# Altium PCB inverter_pcb.PcbDoc
Units mm, origin at the board's own origin, x right, y up, seen from the top; angles counter-clockwise.
Board outline 152.4 x 101.6 mm, 2 copper layers (Top Layer, Bottom Layer); 141 components, 109 nets, 379 pads, 3 vias.
Unrouted connection lines stored in the file: 178.
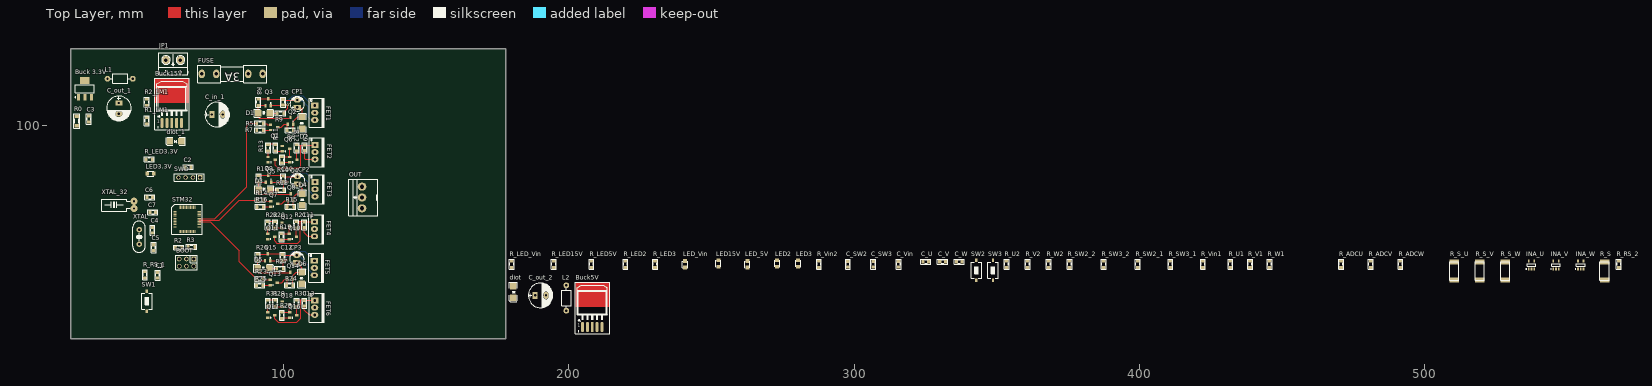
[diagram p0: Top Layer view]
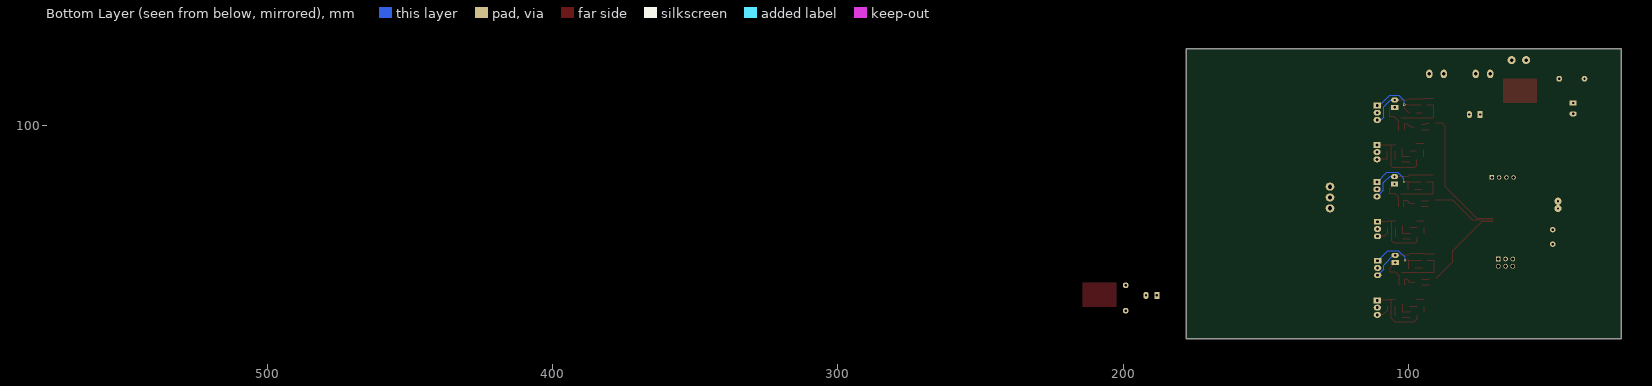
[diagram p1: Bottom Layer view, seen from below]

## Layer stack, top to bottom
Top Solder: solder mask 0.0102, Solder Resist, Dk 3.5
Top Layer: signal copper 0.0356
Dielectric 1: dielectric 0.32, FR-4, Dk 4.8
Bottom Layer: signal copper 0.0356
Bottom Solder: solder mask 0.0102, Solder Resist, Dk 3.5

## Board outline
25.4,25.4 177.8,25.4 177.8,127 25.4,127

## Design rules (kind name [scope] priority, off if disabled: settings)
Clearance [All] p1: gap=0.203 ignorepadtopadclearanceinfootprint=FALSE
PolygonConnect [All] p1: connectstyle=Relief reliefconductorwidth=0.254 reliefentries=4 polygonreliefangle="90 Angle" airgapwidth=0.254
RoutingVias [All] p1: holewidth=0.711 width=1.27 viastyle="Through Hole" minholewidth=0.711 minwidth=1.27 maxholewidth=0.711 maxwidth=1.27
SolderMaskExpansion [All] p1: expansion=0.102
Width [All] p1: maxlimit=1.524 minlimit=0.203 preferedwidth=0.254
30 further rules are at their usual default settings.

## Components (designator, comment, footprint, x,y, rotation, side; value= is the part's Value field where it differs from the comment)
BOOT "JP3x2" JP3-D2T 65.964,52.019 r180 top
Buck5V "LM2576" TO263 207.823,35.433 r0 top
Buck15V "LM2576" TO263 60.452,106.934 r0 top
"Buck 3.3V" "LM3940-3.3" SOT223 30.378,112.903 r0 top
C1 "104,0805" CN-SMD-0805 55.855,47.65 r90 top value=33pF
C2 "104,0805" CN-SMD-0805 66.548,85.522 r180 top value=33pF
C3 "104,0805" CN-SMD-0805 31.75,102.362 r270 top value=33pF
C4 "20P,0805" CN-SMD-0805 54.102,63.373 r270 top value=33pF
C5 "20P,0805" CN-SMD-0805 54.483,57.302 r270 top value=33pF
C6 "20P,0805" CN-SMD-0805 53.121,75.006 r0 top value=33pF
C7 "20P,0805" CN-SMD-0805 54.213,69.723 r0 top value=33pF
C8 "10nF" CN-SMD-0805 99.847,108.28 r90 top value=33pF
C9 "10nF" CN-SMD-0805 107.442,92.278 r270 top value=33pF
C10 "10nF" CN-SMD-0805 99.924,81.432 r90 top value=33pF
C11 "10nF" CN-SMD-0805 107.264,65.329 r270 top value=33pF
C12 "10nF" CN-SMD-0805 99.695,53.873 r90 top value=33pF
C13 "10nF" CN-SMD-0805 107.34,37.795 r270 top value=33pF
C_in_1 "100uF" CP1.5/3.4 74.854,103.911 r0 top value=1000uF/16V
C_out_1 "100uF" CP1.5/3.4 42.291,107.975 r270 top value=1000uF/16V
C_out_2 "100uF" CP1.5/3.4 188.189,40.538 r0 top value=1000uF/16V
C_SW2 "104,0805" CN-SMD-0805 297.815,51.46 r90 top value=33pF
C_SW3 "104,0805" CN-SMD-0805 306.705,51.46 r90 top value=33pF
C_U "XXpF" CN-SMD-0805 325.145,52.4 r0 top value=33pF
C_V "XXpF" CN-SMD-0805 330.987,52.4 r0 top value=33pF
C_Vin "XXpF" CN-SMD-0805 315.595,51.46 r90 top value=33pF
C_W "XXpF" CN-SMD-0805 336.829,52.4 r0 top value=33pF
CP1 "47uF" CP1/2 104.8,106.451 r90 top value=10uF/50V
CP2 "47uF" CP1/2 104.877,79.604 r90 top value=10uF/50V
CP3 "47uF" CP1/2 104.648,52.045 r90 top value=10uF/50V
D1 "T4" DIO-SMD-106 93.193,104.419 r180 top value=1N5007
D2 "M7" DIO-SMD-106 106.553,101.041 r270 top value=1N5007
D3 "T4" DIO-SMD-106 93.269,77.572 r180 top value=1N5007
D4 "M7" DIO-SMD-106 106.629,74.193 r270 top value=1N5007
D5 "T4" DIO-SMD-106 93.04,50.013 r180 top value=1N5007
D6 "M7" DIO-SMD-106 106.401,46.634 r270 top value=1N5007
diot "Diode SMD" DIO-SMD-106 180.569,41.681 r90 top value=1N5007
diot_1 "Diode SMD" DIO-SMD-106 62.205,94.59 r0 top value=1N5007
FET1 "STP80NF70" QTO-220 110.947,107.112 r270 top value=IRF840
FET2 "STP80NF70" QTO-220 110.998,93.294 r270 top value=IRF840
FET3 "STP80NF70" QTO-220 111.023,80.264 r270 top value=IRF840
FET4 "STP80NF70" QTO-220 110.846,66.319 r270 top value=IRF840
FET5 "STP80NF70" QTO-220 110.795,52.705 r270 top value=IRF840
FET6 "STP80NF70" QTO-220 110.922,38.786 r270 top value=IRF840
FUSE "F1A" Fuse1 82.007,118.161 r180 top value=Fuse
INA_U "INA193_4_5" SOT95_SOT23 537.388,51.181 r90 top
INA_V "INA193_4_5" SOT95_SOT23 546.024,51.181 r90 top
INA_W "INA193_4_5" SOT95_SOT23 554.66,51.181 r90 top
JP1 "Header 2_1" HED2 63.856,123.012 r180 top value="Header 2"
L1 "100mH" L/0.4 38.278,116.484 r0 top value="150 mH"
L2 "100mH" L/0.4 199.111,35.179 r90 top value="150 mH"
LED2 "power 0805" LED-0805-Blue 272.974,50.546 r90 top value="LED 3 - 5 ly 2 Colour"
LED3 "power 0805" LED-0805-Blue 280.34,50.546 r90 top value="LED 3 - 5 ly 2 Colour"
LED3.3V "power 0805" LED-0805-Blue 54.483,83.21 r180 top value="LED 3 - 5 ly 2 Colour"
LED15V "power 0805" LED-0805-Blue 252.4,50.546 r90 top value="LED 3 - 5 ly 2 Colour"
LED_5V "power 0805" LED-0805-Blue 262.56,50.292 r90 top value="LED 3 - 5 ly 2 Colour"
LED_Vin "power 0805" LED-0805-Blue 240.716,50.292 r90 top value="LED 3 - 5 ly 2 Colour"
OUT "Header 3" HED3B 127.508,71.044 r90 top
Q1 "G1" SOT23B 96.672,99.441 r270 top value=C1815
Q2 "Y2" SOT23B 102.438,101.778 r0 top value=A1015
Q3 "Y2" SOT23B 94.615,108.28 r0 top value=A1015
Q4 "Y2" SOT23B 103.454,88.101 r270 top value=A1015
Q5 "Y1" SOT23B 95.809,88.101 r270 top value=C1815
Q6 "Y1" SOT23B 100.863,91.937 r270 top value=C1815
Q7 "G1" SOT23B 96.749,72.593 r270 top value=C1815
Q8 "Y2" SOT23B 102.514,74.93 r0 top value=A1015
Q9 "Y2" SOT23B 94.691,81.432 r0 top value=A1015
Q10 "Y2" SOT23B 103.302,61.152 r270 top value=A1015
Q11 "Y1" SOT23B 95.656,61.152 r270 top value=C1815
Q12 "Y1" SOT23B 100.711,64.987 r270 top value=C1815
Q13 "G1" SOT23B 96.52,45.034 r270 top value=C1815
Q14 "Y2" SOT23B 102.286,47.371 r0 top value=A1015
Q15 "Y2" SOT23B 94.463,53.873 r0 top value=A1015
Q16 "Y2" SOT23B 103.378,33.618 r270 top value=A1015
Q17 "Y1" SOT23B 95.733,33.618 r270 top value=C1815
Q18 "Y1" SOT23B 100.787,37.454 r270 top value=C1815
R0 "0 ohm" RES-SMD-1206 27.534,101.702 r90 top
R1_LM1 "Res" RES-SMD-0805 52.095,101.803 r270 top
R2 "100k,0805" RES-SMD-0805 63.297,57.353 r0 top
R2_LM1 "Res" RES-SMD-0805 52.07,108.229 r270 top
R3 "100k,0805" RES-SMD-0805 67.716,57.556 r0 top
R5 "2k2" RES-SMD-0805 91.77,100.813 r180 top
R6 "510" RES-SMD-0805 102.311,98.45 r180 top
R7 "2k2" RES-SMD-0805 91.77,98.45 r180 top
R8 "2k2" RES-SMD-0805 91.161,108.28 r90 top
R9 "100" RES-SMD-0805 98.933,104.343 r0 top
R10 "510" RES-SMD-0805 99.492,88.062 r90 top
R11 "2k2" RES-SMD-0805 97.18,92.278 r90 top
R12 "100" RES-SMD-0805 104.648,92.278 r90 top
R13 "2k2" RES-SMD-0805 94.615,92.278 r270 top
R14 "2k2" RES-SMD-0805 91.846,73.965 r180 top
R15 "510" RES-SMD-0805 102.413,71.603 r180 top
R16 "2k2" RES-SMD-0805 91.846,71.603 r180 top
R17 "2k2" RES-SMD-0805 91.237,81.432 r90 top
R18 "100" RES-SMD-0805 99.009,77.495 r0 top
R19 "510" RES-SMD-0805 99.339,61.112 r90 top
R20 "2k2" RES-SMD-0805 97.028,65.329 r90 top
R21 "100" RES-SMD-0805 104.496,65.329 r90 top
R22 "2k2" RES-SMD-0805 94.437,65.329 r270 top
R23 "2k2" RES-SMD-0805 91.618,46.406 r180 top
R24 "510" RES-SMD-0805 102.159,44.044 r180 top
R25 "2k2" RES-SMD-0805 91.618,44.044 r180 top
R26 "2k2" RES-SMD-0805 91.008,53.873 r90 top
R27 "100" RES-SMD-0805 98.781,49.936 r0 top
R28 "510" RES-SMD-0805 99.441,33.579 r90 top
R29 "2k2" RES-SMD-0805 97.104,37.795 r90 top
R30 "100" RES-SMD-0805 104.572,37.795 r90 top
R31 "2k2" RES-SMD-0805 94.539,37.795 r270 top
R_ADCU "Res" RES-SMD-0805 470.687,51.46 r90 top
R_ADCV "Res" RES-SMD-0805 481.076,51.46 r90 top
R_ADCW "Res" RES-SMD-0805 491.49,51.46 r90 top
R_LED2 "510,0805" RES-SMD-0805 219.862,51.46 r90 top
R_LED3 "510,0805" RES-SMD-0805 230.251,51.46 r90 top
R_LED3.3V "510,0805" RES-SMD-0805 52.934,88.189 r180 top
R_LED5V "510,0805" RES-SMD-0805 207.924,51.46 r90 top
R_LED15V "510,0805" RES-SMD-0805 194.716,51.46 r90 top
R_LED_Vin "510,0805" RES-SMD-0805 179.984,51.46 r90 top
R_RS_1 "10k,0805" RES-SMD-0805 51.435,47.803 r90 top
R_RS_2 "10k,0805" RES-SMD-0805 568.02,51.46 r90 top
R_S "Res" RES-SMD-2512 563.143,49.098 r90 top
R_S_U "Res" RES-SMD-2512 510.515,49.098 r90 top
R_S_V "Res" RES-SMD-2512 519.43,49.098 r90 top
R_S_W "Res" RES-SMD-2512 528.32,49.098 r90 top
R_SW2_1 "10k,0805" RES-SMD-0805 399.415,51.46 r90 top
R_SW2_2 "10k,0805" RES-SMD-0805 375.539,51.46 r90 top
R_SW3_1 "10k,0805" RES-SMD-0805 410.845,51.46 r90 top
R_SW3_2 "10k,0805" RES-SMD-0805 387.477,51.46 r90 top
R_U1 "Res" RES-SMD-0805 431.902,51.46 r90 top
R_U2 "Res" RES-SMD-0805 353.441,51.46 r90 top
R_V1 "Res" RES-SMD-0805 438.76,51.46 r90 top
R_V2 "Res" RES-SMD-0805 360.807,51.46 r90 top
R_Vin1 "Res" RES-SMD-0805 422.275,51.46 r90 top
R_Vin2 "Res" RES-SMD-0805 287.655,51.46 r90 top
R_W1 "Res" RES-SMD-0805 445.618,51.46 r90 top
R_W2 "Res" RES-SMD-0805 368.173,51.46 r90 top
STM32 "STM32F103C8T6" "LQFP 48" 61.451,71.937 r0 top
SW1 "2" SW1-SMD 52.095,38.532 r90 top value="SW chip 2 pin"
SW2 "2" SW1-SMD 342.824,49.352 r90 top value="SW chip 2 pin"
SW3 "2" SW1-SMD 348.666,49.352 r90 top value="SW chip 2 pin"
SWD "JP4" JP4-C1T 70.764,81.89 r180 top
XTAL "8Mhz" XT2 49.428,61.036 r90 top value=4Mhz
XTAL_32 "32,768 Khz" XT32k 47.6,70.993 r180 top value=32,768khz

## Footprints (in the part's own frame and the unit in brackets; to place one, negate y for a bottom-side part, rotate by r counter-clockwise, add the part's x,y. Pads: shape width x height; smd on the part's side, far side on the other; paste and mask are expansions set on the pad)
CN-SMD-0805 [mm]
  rect 1.1x1.397 smd: 1(-1,0) 2(1,0)
  silkscreen extent -1.78,-0.86 1.78,0.84, body extent -1,-0.62 1,0.63, height 0.8
CP1.5/3.4 [mil] "Tu hoa 220->470uF,16V, 470uF/16V,25V"
  rect 70x100 hole 32: 1(0,0)
  oval 70x100 hole 32: 2(150,0)
  silkscreen extent -95,-170 245,170, body extent -85,-157 230,157, height 446
CP1/2 [mil] "Tu hoa < 22uF/16>50V"
  rect 70x100 hole 32: 1(0,0)
  oval 70x100 hole 32: 2(100,0)
  silkscreen extent -53,-100 146,100, body extent -49,-99 149,99, height 287
DIO-SMD-106 [mil]
  rect 90x90.55 smd: 1(80,0) 2(-80,0)
  silkscreen extent -130,-55 135,55, body extent -99,-50 106,52, height 95
Fuse1 [mm]
  oval 2.2x3 hole 1.2: 1(-10.684,0) 1(-5.604,0) 2(5.579,0) 2(10.659,0)
  silkscreen extent -12.12,-3.05 12.09,3.05, body extent -10.84,-2.95 10.87,2.95, height 9.75
HED2 [mil] "Header 2, 2 pin, hight 300mil, Pin to Pin 200, Colour Green"
  round 110 hole 50: 1(0,0) 2(200,0)
  silkscreen extent -106,-100 300,200, body extent -92,-140 302,155, height 394
HED3B [mil] "Header 3, 3 pin, hight 300mil, Pin to Pin 150, Colour White"
  oval 110x120 hole 60: 1(0,0) 2(150,0) 3(300,0)
  silkscreen extent -100,-220 400,180, body extent -104,-221 400,145, height 285
JP3-D2T [mm] "6 pins, dual pin, straight, gold plating"
  rect 1.6x1.6 hole 1.1: 1(-2.54,-1.27)
  round 1.6 hole 1.1: 2(0,-1.27) 3(2.54,-1.27) 4(2.54,1.27) 5(0,1.27) 6(-2.54,1.27)
  silkscreen extent -3.81,-2.54 3.81,2.54, body extent -3.81,-2.54 3.81,2.54, height 8.55
JP4-C1T [mm] "4 row, straight, gold plating"
  rect 1.52x1.52 hole 1.02: 1(0,0)
  round 1.52 hole 1.02: 2(2.54,0) 3(5.08,0) 4(7.62,0)
  silkscreen extent -1.52,-1.27 9.14,1.27, body extent -1.52,-1.25 9.14,1.25, height 8.51
L/0.4 [mil] "Inductor , 2 Pin, L 350mil, W 150 mil"
  round 80 hole 31: 1(0,0) 2(350,0)
  silkscreen extent 40,-65 310,65
LED-0805-Blue [mil]
  rect 50x55 smd: 1(0,0) 2(90,0)
  silkscreen extent 0,-35 90,35, body extent 5,-25 85,25, height 43
"LQFP 48" [mm]
  rect 1.2x0.3 smd: 1(0.5,-2) 2(0.5,-2.5) 3(0.5,-3) 4(0.5,-3.5) 5(0.5,-4) 6(0.5,-4.5) 7(0.5,-5) 8(0.5,-5.5) 9(0.5,-6) 10(0.5,-6.5) 11(0.5,-7) 12(0.5,-7.5) 25(9,-7.5) 26(9,-7) 27(9,-6.5) 28(9,-6) 29(9,-5.5) 30(9,-5) 31(9,-4.5) 32(9,-4) 33(9,-3.5) 34(9,-3) 35(9,-2.5) 36(9,-2)
  round 1 on Top Overlay: 3(0.7,-0.7)
  rect 0.3x1.2 smd: 13(2,-9) 14(2.5,-9) 15(3,-9) 16(3.5,-9) 17(4,-9) 18(4.5,-9) 19(5,-9) 20(5.5,-9) 21(6,-9) 22(6.5,-9) 23(7,-9) 24(7.5,-9) 37(7.5,-0.5) 38(7,-0.5) 39(6.5,-0.5) 40(6,-0.5) 41(5.5,-0.5) 42(5,-0.5) 43(4.5,-0.5) 44(4,-0.5) 45(3.5,-0.5) 46(3,-0.5) 47(2.5,-0.5) 48(2,-0.5)
  silkscreen extent -0.6,-10 10,0.5, body extent 0.15,-9.35 9.35,-0.15, height 1.6
QTO-220 [mil] "TO-220 - 1-2-3"
  rect 80x100 hole 39: 1(0,0)
  oval 80x100 hole 39: 2(100,0) 3(200,0)
  silkscreen extent -100,-76 300,130, body extent -119,-64 322,121, height 755
RES-SMD-0805 [mil]
  rect 39.37x55 smd: 1(-45,0) 2(45,0)
  silkscreen extent -70,-34 70,33, body extent -39,-25 39,25, height 31
RES-SMD-1206 [mil]
  rect 50x65 smd: 1(-65,0) 2(65,0)
  silkscreen extent -99,-38 99,39, body extent -63,-31 63,32, height 40
RES-SMD-2512 [mm] "Chip Capacitor, Body 3.2x2.5mm, IPC Medium Density"
  rect 1.8x3.3 smd: 1(-3.2,0.127) 2(3.2,0.127)
  silkscreen extent -3.2,-1.47 3.2,1.73, body extent -3.2,-1.47 3.2,1.73, height 0.6
SOT23B [mm] "SOT 23B"
  rect 0.85x1.2 smd: 1(0.94,-1.245) 2(0,1.25) 3(-0.95,-1.25)
  silkscreen extent 0.77,-0.38 1.02,-0.13, body extent -1.5,-1.3 1.5,1.2, height 1.06
SOT95_SOT23 [mm] "SOT23, 5-Leads, Body 2,90x2,80mm, Pitch 0,95mm, IPC Medium Density"
  rect 1x0.6 smd: 1(-1.375,0.95) 2(-1.375,0) 3(-1.375,-0.95) 4(1.375,-0.95) 5(1.375,0.95)
  silkscreen extent -1.5,-1.55 0.5,1.92, body extent -0.88,-1.52 0.87,1.53, height 1.1
SOT223 [mm]
  rect 1x2.4 smd: 1(-2.3,-2.9) 2(0,-2.9) 3(2.3,-2.9)
  rect 3.3x2.4 smd: 4(0,2.9)
  silkscreen extent -3.47,-3.02 3.35,1.4, body extent -3.25,-3.56 3.25,3.4, height 1.68
SW1-SMD [mm]
  rect 1.2x0.8 smd: 1(-3.5,0) 2(3.5,0)
  silkscreen extent -2.82,-1.85 2.82,1.85, body extent -3.05,-1.85 3.05,1.85, height 2.5
TO263 [mm]
  rrect50% 1x3.4 smd: 1(-3.019,-5.969) 2(-1.319,-5.969) 4(2.081,-5.969) 5(3.781,-5.969)
  rrect50% 1x3.4 smd mask+0: 3(0.381,-5.969)
  Top Layer region: -5.568,1.016 6.432,1.016 6.432,9.65 -5.568,9.65
  silkscreen extent -5.57,-8.35 6.43,9.65, body extent -4.73,-6.84 5.43,7.8, height 4.57
XT2 [mil] "Footpin for Crystal 2 pin"
  round 75 hole 34: 1(-100,0) 2(100,0)
  silkscreen extent -213,-83 217,90, body extent -216,-87 216,90, height 144
XT32k [mil] "Crystal 32k, 2 pin, real timer for DS1307"
  oval 95x100 hole 32: 1(0,0) 2(0,-100)
  silkscreen extent 50,-130 449,36

## Part data
BOOT: "WR-PHD 2.54 mm Dual Socket Header", Manufacturer="W¨¹rth Elektronik eiSos GmbH", partNo=61300621821, ComponentLink1 Description=Manufacturer, ComponentLink1URL=http://www.we-online.com, ComponentLink2 Description=Datasheet, ComponentLink2URL=http://katalog.we-online.de/em/datasheet/6130xx21821.pdf, Created by="Karrer Zheng", Created Date="29 March 2013", NoPins=06
Buck5V Buck15V: Max Input Voltage="12 V", Max Output Current="3 (6.0 peak) A", Max Output Voltage=mV, Temperature Range="-40 to +125 degC", Category=IC-Power, Min Input Voltage=mV, Min Output Voltage=mV, Mounting Technology="Surface Mount", Status=Unreleased, Supply Voltage=mV
"Buck 3.3V": library part LM3940-3.3-SOT223, "3.3 VOLT LINEAR REGULATOR SOT223", Current - Limit (Min)=-, Current - Output=1A, Manufacturer="National Semiconductor", Manufacturer Part Number=LM3940IMP-3.3/NOPB, Operating Temperature="-40°C ~ 125°C", Package / Case="SOT-223 (3 leads + Tab), SC-73, TO-261AA", Supplier Part Number=LM3940IMP-3.3DKR-ND, Voltage - Dropout (Typical)="0.11V @ 100mA", Voltage - Input="4.5 ~ 5.5 V", Voltage - Output=3.3V, Category="Integrated Circuits (ICs)", Number of Regulators=1, Packaging=Digi-Reel®, Regulator Topology="Positive Fixed", RoHS="RoHS Compliant", Supplier=Digi-Key, Supplier 1=Digi-Key, Supplier Part Number 1=LM3940IMP-3.3DKR-ND
C1 C2 C3 C4 C5 C6 C7 C8 C9 C10 C11 C12 C13 C_SW2 C_SW3 C_U C_V C_Vin C_W: library part CN
C_in_1 C_out_1 C_out_2: library part CP4, "Cap 1000uF/16V - 220uF/50V", Description 1="2200uF-3300uF/6,3V - 1000uF-2200uF/10V", Description 2="1000uF/16V - 470uF => 1000uF/25V - 100uF/100V", Description 3=330uF>470uF/35V_220uF>470uF/50V_10uF>22uF/250V, Description 4="220uF => 330uF/63V - 10uF =>33uF/160 - 200V", Description 5="4,7uF>10uF/250V_3,3uF>10uF/400V - 2,2uF>4,7uF/450V"
CP1 CP2 CP3: library part CP1, "Cap P  0,1uF < 22uF , 16 - 50V", Description 1="10 => 220uF/6,3V/10V - 10uF => 100uF/16V", Description 2="0,1uF => 33uF/50V - 10uF => 22uF/63V", Description 3="0,47uF => 10uF/100V"
D1 D2 D3 D4 D5 D6: library part "Diode SMD", "Default Diode", Code - JEDEC=DO-214-AB, Published=8-Jun-2000, Publisher="Altium Limited", Revision="July-2002: Re-released for DXP Platform."
diot diot_1: "Default Diode", Code - JEDEC=DO-214-AB, Published=8-Jun-2000, Publisher="Altium Limited", Revision="July-2002: Re-released for DXP Platform."
FET1 FET2 FET3 FET4 FET5 FET6: library part IRF840, "MOSFET N - CHANNEL 500V - 0.75 - 8A - TO-220"
FUSE: library part Fuse, "Fuse", Designed by=VanDungEvn
JP1: "Header, 2-Pin", Manufacturer="Generic Components", Class=Connector
L1 L2: library part L1, "Inductor"
LED2 LED3 LED3.3V LED15V LED_5V LED_Vin: library part "LED SMD"
OUT: library part Hed3, "Header 3 (Green)"
Q1 Q5 Q6 Q7 Q11 Q12 Q13 Q17 Q18: library part C1815, "NPN 600mW, ECB", =C2383
Q2 Q3 Q4 Q8 Q9 Q10 Q14 Q15 Q16: library part A1015, "PNP 600mW, ECB", =A1013
R0 R1_LM1 R2 R2_LM1 R3 R5 R6 R7 R8 R9 R10 R11 R12 R13 R14 R15 R16 R17 R18 R19 R20 R21 R22 R23 R24 R25 R26 R27 R28 R29 R30 R31 R_ADCU R_ADCV R_ADCW R_LED2 R_LED3 R_LED3.3V R_LED5V R_LED15V R_LED_Vin R_RS_1 R_RS_2 R_S R_S_U R_S_V R_S_W R_SW2_1 R_SW2_2 R_SW3_1 R_SW3_2 R_U1 R_U2 R_V1 R_V2 R_Vin1 R_Vin2 R_W1 R_W2: library part Res-SMD, "Resistor", Manufacturer="Generic Components", Class=Passive, Published=08/06/2000, Publisher="Altium Hobart Technology Centre"
STM32: Manufacturer=STMicroelectronics, Maximum Frequency=72MHz, Maximum Operating Temperature="+85 °C", Minimum Operating Temperature="-40 °C", Package Type=LQFP, Supplier Part Number 1=497-6063-ND, Typical Operating Supply Voltage="2 ? 3.6 V", ADC Channels=10, ADC Resolution=12bit, ADCs="2(10 x 12 bit)", ComponentLink1Description=http://www.st.com/web/en/resource/technical/document/datasheet/CD00161566.pdf?src-supplier=Future+Electronics, ComponentLink1URL=http://www.st.com/web/en/resource/technical/document/datasheet/CD00161566.pdf?src-supplier=Future+Electronics, ComponentLink2Description=https://www.distrelec.biz/Web/Downloads/3_/en/puSTM_ARM-MicroCont-STM32F103_EN.pdf?mime=application%2Fpdf&src-supplier=Distrelec, ComponentLink2URL=https://www.distrelec.biz/Web/Downloads/3_/en/puSTM_ARM-MicroCont-STM32F103_EN.pdf?mime=application%2Fpdf&src-supplier=Distrelec, ComponentLink3Description=https://www.verical.com/server-webapp/html/getDatasheet?partID=69880&src-supplier=Verical, ComponentLink3URL=https://www.verical.com/server-webapp/html/getDatasheet?partID=69880&src-supplier=Verical, ComponentLink4Description=http://www.farnell.com/datasheets/1730126.pdf?src-supplier=Element14, ComponentLink4URL=http://www.farnell.com/datasheets/1730126.pdf?src-supplier=Element14, ComponentLink5Description=http://www.produktinfo.conrad.com/datenblaetter/1000000-1099999/001075658-da-01-en-MCU_64KB_MEM_STM32F103C8T6_LQFP_48_STM.pdf?src-supplier=Conrad, ComponentLink5URL=http://www.produktinfo.conrad.com/datenblaetter/1000000-1099999/001075658-da-01-en-MCU_64KB_MEM_STM32F103C8T6_LQFP_48_STM.pdf?src-supplier=Conrad, ComponentLink6Description=http://datasheet.iiic.cc/stmicroelectronics/STM32F103C8T6.pdf?src-supplier=IIIC, ComponentLink6URL=http://datasheet.iiic.cc/stmicroelectronics/STM32F103C8T6.pdf?src-supplier=IIIC, Data Bus Width=32bit, Device Core="ARM Cortex M3", Dimensions="7.2 x 7.2 x 1.45mm", Family Name=STM32F, Height=1.45mm, Instruction Set Architecture=RISC, Length=7.2mm, Manufacturer Part Number=STM32F103C8T6, Mounting Type="Surface Mount", Number of ADC Units=2, Number of CAN Channels=1, Number of I2C Channels=2, Number of PWM Units=1, Number of SPI Channels=2, Number of Timers=3, Number of USART Channels=3, Pin Count=48, Pricing 1="1=6.06, 10=5.438, 250=4.2272, 500=3.7931, 1000=3.199 (USD)", Program Memory Size="64 kB", Program Memory Type=Flash, Pulse Width Modulation="1(16 bit) (Motor Control)", PWM Resolution=16bit, RAM Size="20 kB", Stock 1=2374, Supplier 1=Digi-Key, Timer Resolution=16bit, Timers="3 x 16 bit", USB Channels="1 x Device", Width=7.2mm
SW1 SW2 SW3: library part SW2, "Switch button 2 pin"
SWD: "WR-PHD 2.54 mm Angled Socket Header", Manufacturer="W¨¹rth Elektronik eiSos GmbH", partNo=613004143121, ComponentLink1 Description=Manufacturer, ComponentLink1URL=http://www.we-online.com, ComponentLink2 Description=Datasheet, ComponentLink2URL=http://katalog.we-online.de/em/datasheet/6130xx143121.pdf, Created by="Karrer Zheng", Created Date="29 March 2013", NoPins=04
XTAL: library part XT2, "Crystal, 32.768 KHz, -40 to 85 degC, 3.2 x 1.5 x 0.9 mm SMD"
XTAL_32: library part XT32k, "Crystal 32,768kHz for timer real"
INA_U INA_V INA_W: INA193=INA193, Supplier 1=Digi-Key

## Via types
v1: diameter 0.762, hole 0.254, Top Layer to Bottom Layer, 3 vias

## Nets (pads, with @x,y where several pads share a name; then routed paths per layer and width w, separated by ;. In a path a pad name is that pad's centre, name@x,y a point inside that pad or via, vN(x,y) a via of type N, cw(c..) or ccw(c..) an arc to the next point about the centre after c; other vN are vias at no path point)
5V: "Buck 3.3V.1" Buck5V.4 C_out_2.1 L2.2 LED_5V.1
15V: Buck5V.1 C_out_1.1 L1.2 LED15V.1 Q4.1 Q10.1 Q16.1 R2_LM1.1 R10.1 R19.1 R28.1 | length 8.5
  Top Layer w0.254: R19.1 99.582,60.212 Q10.1 ; R28.1 99.684,32.679 Q16.1 ; R10.1 99.695,87.122 102.006,87.122 Q4.1@102.21,87.325
24V: FET1.2 FET3.2 FET5.2
BOOT0: R2.1 STM32.44
CLK: STM32.37 SWD.3
DIO: STM32.34 SWD.2
GND: Buck5V.3 Buck5V.5 Buck15V.3 Buck15V.5 C_in_1.2 C_out_1.2 C_out_2.2 C_U.1 C_V.1 C_Vin.1 C_W.1 diot.1 diot_1.1 JP1.1 Q5.1 Q11.1 Q17.1 R0.1 R1_LM1.2 R7.2 R16.2 R25.2 R_S.2 R_U2.2 R_V2.2 R_Vin2.2 R_W2.2
GND_1: "Buck 3.3V.2" BOOT.3 BOOT.4 C1.1 C2.1 C3.1 C4.2 C5.2 C6.2 C7.2 C_SW2.1 C_SW3.1 INA_U.2 INA_V.2 INA_W.2 R0.2 R_LED2.2 R_LED3.2 R_LED3.3V.2 R_LED5V.2 R_LED15V.2 R_LED_Vin.2 STM32.8 STM32.23 STM32.35 STM32.47 SW1.1 SW2.1 SW3.1 SWD.1
NetBOOT_2: BOOT.2 R2.2
NetBOOT_5: BOOT.5 R3.2
NetBuck5V_2: Buck5V.2 diot.2 L2.1
NetBuck15V_2: Buck15V.2 diot_1.2 L1.1
NetBuck15V_4: Buck15V.4 R1_LM1.1 R2_LM1.2
NetC8_1: C8.1 FET1.1 Q3.1 R9.2 | length 22.4
  Top Layer w0.254: Q3.1@95.555,107.163 C8.1@99.603,107.163 ; C8.1@99.873,107.264 99.898,107.239 100,107.34 v1(101.473,107.34) 101.473,106.096 99.898,104.521 R9.2
  Bottom Layer w0.254: v1(101.473,107.34) 101.473,108.737 103.226,110.49 106.705,110.49 110.084,107.112 FET1.1
NetC9_1: C9.1 FET2.1 Q5.2 R12.2 | length 25.4
  Top Layer w0.254: Q5.2 97.059,86.177 97.917,85.319 105.588,85.319 106.096,85.827 106.096,93.218 ; R12.2 104.851,93.218 106.096,93.218 ; FET2.1@110.998,93.218 106.096,93.218
NetC9_2: C9.2 C11.2 C13.2 FET2.3 FET4.3 FET6.3 R_S.1 | length 18.7
  Top Layer w0.254: C11.2 107.264,62.535 108.56,61.239 FET4.3 ; C13.2 107.341,35.382 109.017,33.706 FET6.3 ; C9.2 107.442,88.5 107.671,88.272 110.636,88.272 110.769,88.138 FET2.3@111.658,88.138
NetC10_1: C10.1 FET3.1 Q9.1 R18.2 | length 21.8
  Top Layer w0.254: Q9.1 99.679,80.188 C10.1 C10.1@100.041,80.315 ; R18.2 100.152,80.204 C10.1@100.041,80.315 ; v1(101.6,80.315) C10.1@100.041,80.315
  Bottom Layer w0.254: v1(101.6,80.315) 101.6,81.509 103.657,83.566 107.721,83.566 FET3.1
NetC11_1: C11.1 FET4.1 Q11.2 R21.2 | length 24.4
  Top Layer w0.254: Q11.2 96.906,59.608 97.688,58.826 105.004,58.826 105.867,59.69 105.867,66.472 ; R21.2 105.867,66.472 ; FET4.1 107.274,66.319 C11.1 107.121,66.472 105.867,66.472
NetC12_1: C12.1 FET5.1 Q15.1 R27.2 | length 21.8
  Top Layer w0.254: Q15.1 99.45,52.629 C12.1 ; R27.2 99.924,52.645 C12.1 ; v1(101.203,52.874) C12.1
  Bottom Layer w0.254: v1(101.203,52.874) 101.203,53.832 103.454,56.083 107.417,56.083 FET5.1
NetC13_1: C13.1 FET6.1 Q17.2 R30.2 | length 24.1
  Top Layer w0.254: Q17.2 96.983,32.303 98.095,31.191 104.597,31.191 105.994,32.588 105.994,38.938 ; R30.2 105.994,38.938 ; FET6.1 107.35,38.786 C13.1 107.197,38.938 105.994,38.938
NetCP1_1: CP1.1 D2.2 Q2.1 R6.1 | length 11.4
  Top Layer w0.254: Q2.1 103.403,100.508 R6.1@103.403,98.45 ; Q2.1@103.48,100.838 103.48,101.6 104.953,103.073 D2.2 106.553,106.07 106.248,106.375 104.877,106.375 CP1.1
NetCP2_1: CP2.1 D4.2 Q8.1 R15.1 | length 11.2
  Top Layer w0.254: R15.1 103.454,71.704 Q8.1 103.454,75.006 104.673,76.225 D4.2 106.629,77.851 CP2.1
NetCP3_1: CP3.1 D6.2 Q14.1 R24.1 | length 11.2
  Top Layer w0.254: R24.1@103.251,44.044 103.251,46.101 Q14.1 103.226,47.396 104.496,48.666 D6.2 106.401,50.292 CP3.1
NetD1_1: D1.1 Q2.2 Q3.3 R8.1 | length 18.1
  Top Layer w0.254: R8.1@91.161,107.01 D1.1 91.161,102.921 91.44,102.641 102.052,102.641 Q2.2 ; R8.1@91.161,107.163 93.66,107.163 Q3.3@93.665,107.157
NetD1_2: D1.2 R9.1 | length 2.2
  Top Layer w0.254: D1.2 97.333,104.419 R9.1@97.409,104.343
NetD3_1: D3.1 Q8.2 Q9.3 R17.1 | length 18.1
  Top Layer w0.254: Q9.3 91.344,80.182 R17.1 D3.1 91.237,76.175 91.465,75.946 102.28,75.946 Q8.2
NetD3_2: D3.2 R18.1 | length 2.6
  Top Layer w0.254: D3.2 97.79,77.572 R18.1
NetD5_1: D5.1 Q14.2 Q15.3 R26.1 | length 18
  Top Layer w0.254: Q15.3 93.406,52.73 R26.1 D5.1 91.008,48.641 91.168,48.482 102.146,48.482 Q14.2
NetD5_2: D5.2 R27.1 | length 2.6
  Top Layer w0.254: D5.2 97.561,50.013 R27.1
NetFUSE_1: FUSE.1 JP1.2
NetINA_U_1: INA_U.1 R_ADCU.1
NetINA_V_1: INA_V.1 R_ADCV.1
NetINA_W_1: INA_W.1 R_ADCW.1
NetLED2_2: LED2.2 R_LED2.1
NetLED3.3V_2: LED3.3V.2 R_LED3.3V.1
NetLED3_2: LED3.2 R_LED3.1
NetLED15V_2: LED15V.2 R_LED15V.1
NetLED_5V_2: LED_5V.2 R_LED5V.1
NetLED_Vin_2: LED_Vin.2 R_LED_Vin.1
NetQ1_1: Q1.1 R7.1 | length 2.5
  Top Layer w0.254: R7.1@92.913,98.462 95.388,98.462 Q1.1
NetQ1_2: Q1.2 Q2.3 R6.2 | length 6
  Top Layer w0.254: Q1.2 99.162,99.441 100.248,100.528 Q2.3@101.336,100.528 ; R6.2@101.143,98.577 101.336,98.77 Q2.3@101.336,100.528 ; Q2.3 Q2.3@101.336,100.528
NetQ1_3: Q1.3 R5.1 | length 2.6
  Top Layer w0.254: R5.1@92.913,100.711 94.031,100.711 94.351,100.391 Q1.3
NetQ4_2: Q4.2 R12.1 | length 3
  Top Layer w0.254: R12.1@104.572,91.135 104.572,88.347 Q4.2@104.704,88.214
NetQ4_3: Q4.3 Q6.2 R10.2 | length 5.5
  Top Layer w0.254: R10.2 99.532,89.164 102.21,89.164 Q6.2@102.21,91.937
NetQ5_3: Q5.3 R13.2 | length 2.4
  Top Layer w0.254: Q5.3@94.615,89.051 R13.2 R13.2@94.615,91.415
NetQ6_1: Q6.1 R11.1 | length 2.4
  Top Layer w0.254: R11.1@97.257,91.059 Q6.1@99.619,91.059
NetQ7_1: Q7.1 R16.1 | length 2.5
  Top Layer w0.254: R16.1 93.04,71.653 Q7.1
NetQ7_2: Q7.2 Q8.3 R15.2 | length 6.2
  Top Layer w0.254: Q7.2 99.416,72.593 100.502,73.68 Q8.3 101.564,71.897 R15.2
NetQ7_3: Q7.3 R14.1 | length 2.7
  Top Layer w0.254: R14.1 93.411,73.543 Q7.3
NetQ10_2: Q10.2 R21.1 | length 3.1
  Top Layer w0.254: R21.1 104.496,61.208 Q10.2
NetQ10_3: Q10.3 Q12.2 R19.2 | length 5.7
  Top Layer w0.254: R19.2 99.493,62.102 Q10.3 101.961,62.193 Q12.2
NetQ11_3: Q11.3 R22.2 | length 2.1
  Top Layer w0.254: Q11.3 94.437,62.133 R22.2
NetQ12_1: Q12.1 R20.1 | length 2.5
  Top Layer w0.254: R20.1 99.328,64.186 Q12.1
NetQ13_1: Q13.1 R25.1 | length 2.5
  Top Layer w0.254: R25.1 92.812,44.094 Q13.1
NetQ13_2: Q13.2 Q14.3 R24.2 | length 6.2
  Top Layer w0.254: Q13.2 99.289,45.034 100.375,46.121 Q14.3 101.336,44.414 R24.2@100.965,44.044
NetQ13_3: Q13.3 R23.1 | length 2.7
  Top Layer w0.254: R23.1 93.182,45.984 Q13.3
NetQ16_2: Q16.2 R30.1 | length 3.1
  Top Layer w0.254: R30.1 104.572,33.675 Q16.2
NetQ16_3: Q16.3 Q18.2 R28.2 | length 5.7
  Top Layer w0.254: R28.2 99.594,34.568 Q16.3 102.037,34.659 Q18.2
NetQ17_3: Q17.3 R31.2 | length 2.1
  Top Layer w0.254: Q17.3 94.539,34.625 R31.2
NetQ18_1: Q18.1 R29.1 | length 2.5
  Top Layer w0.254: R29.1 97.242,36.514 Q18.1
NetR_RS_2_2: R_RS_2.2 SW1.2
NetR_SW2_2_1: R_SW2_2.1 SW2.2
NetR_SW3_2_1: R_SW3_2.1 SW3.2
NRST: C1.2 R_RS_1.2 R_RS_2.1 STM32.7
PA0: R_ADCU.2 STM32.10
PA1: R_ADCV.2 STM32.11
PA2: R_ADCW.2 STM32.12
PA3: C_U.2 R_U1.2 R_U2.1 STM32.13
PA4: C_V.2 R_V1.2 R_V2.1 STM32.14
PA5: C_W.2 R_W1.2 R_W2.1 STM32.15
PA6: C_Vin.2 R_Vin1.2 R_Vin2.1 STM32.16
PA7: STM32.17
PA8: R23.2 STM32.29 | length 30.6
  Top Layer w0.254: STM32.29 70.47,66.417 74.35,66.417 84.557,56.21 84.557,52.324 R23.2
PA9: R14.2 STM32.30 | length 23.2
  Top Layer w0.254: STM32.30 77.453,66.937 84.48,73.965 R14.2
PA10: R5.2 STM32.31 | length 46.4
  Top Layer w0.254: STM32.31 75.895,67.437 87.071,78.613 87.071,99.822 88.062,100.813 R5.2
PA11: STM32.32
PA12: STM32.33
PA15: STM32.38
PB0: STM32.18
PB1: STM32.19
PB2/B1: R3.1 STM32.20
PB3: LED2.1 STM32.39
PB4: LED3.1 STM32.40
PB5: STM32.41
PB6: STM32.42
PB7: STM32.43
PB8: STM32.45
PB9: STM32.46
PB10: C_SW2.2 R_SW2_1.2 R_SW2_2.2 STM32.21
PB11: C_SW3.2 R_SW3_1.2 R_SW3_2.2 STM32.22
PB12: STM32.25
PB13: R29.2 R31.1 STM32.26 | length 2.6
  Top Layer w0.254: R31.1 R29.2
PB14: R20.2 R22.1 STM32.27 | length 2.6
  Top Layer w0.254: R22.1 R20.2
PB15: R11.2 R13.1 STM32.28 | length 2.9
  Top Layer w0.254: R13.1@94.615,93.701 96.876,93.701 96.901,93.726 R11.2@97.511,93.726
PC13: STM32.2
PC14: C6.1 STM32.3@61.951,68.937 XTAL_32.2
PC15: C7.1 STM32.4 XTAL_32.1
PD0: C4.1 STM32.5 XTAL.2
PD1: C5.1 STM32.6 XTAL.1
U: INA_U.3 OUT.3 R_S_U.2 R_U1.1
U_PHASE: C8.2 CP1.2 FET1.3 FET2.2 INA_U.4 Q3.2 R8.2 R_S_U.1 | length 25.2
  Top Layer w0.254: R8.2@91.161,109.449 Q3.2@94.615,109.449 ; Q3.2@94.615,109.708 95.043,109.28 C8.2 100.127,109.001 CP1.2@104.791,109.001
  Bottom Layer w0.254: CP1.2 105.004,108.788 106.502,108.788 108.636,106.655 108.636,102.895 109.499,102.032 FET1.3
V: INA_V.3 OUT.2 R_S_V.2 R_V1.1
V_IN: Buck15V.1 C_in_1.1 D2.1 D4.1 D6.1 FUSE.2 LED_Vin.1 R_Vin1.1
V_PHASE: C10.2 CP2.2 FET3.3 FET4.2 INA_V.4 Q9.2 R17.2 R_S_V.1 | length 24.4
  Top Layer w0.254: R17.2 94.584,82.575 Q9.2 99.674,82.682 C10.2 100.212,82.144 CP2.2
  Bottom Layer w0.254: CP2.2 106.578,82.144 108.763,79.959 108.763,77.445 FET3.3
VCC3V3: "Buck 3.3V.3" BOOT.1 BOOT.6 C2.2 C3.2 INA_U.5 LED3.3V.1 Q6.3 Q12.3 Q18.3 R_RS_1.1 R_SW2_1.1 R_SW3_1.1 STM32.1 STM32.9 STM32.24 STM32.36 STM32.48 SWD.4
VCC3V4: INA_V.5
VCC3V5: INA_W.5
W: INA_W.3 OUT.1 R_S_W.2 R_W1.1
W_PHASE: C12.2 CP3.2 FET5.3 FET6.2 INA_W.4 Q15.2 R26.2 R_S_W.1 | length 23.8
  Top Layer w0.254: R26.2 94.356,55.016 Q15.2 99.445,55.123 C12.2 99.984,54.585 CP3.2
  Bottom Layer w0.254: CP3.2 105.258,54.585 108.687,51.156 108.687,49.733 FET5.3
pads on no net: "Buck 3.3V.4" STM32.3@62.151,71.237

## Text inside footprints (layer, text, board x,y; h text height)
Buck5V: Top Overlay "1" at 203.178,29.515 h1
Buck15V: Top Overlay "1" at 55.807,101.016 h1
FUSE: Top Overlay "3A" at 84.75,119.71 h5 r180